# Altium PCB IMU_sensor_node_hardware.PcbDoc
Units mil, origin at the board's own origin, x right, y up, seen from the top; angles counter-clockwise.
Board outline 1815 x 2180 mil, 2 copper layers (Top Layer, Bottom Layer); 32 components, 22 nets, 193 pads, 12 vias.
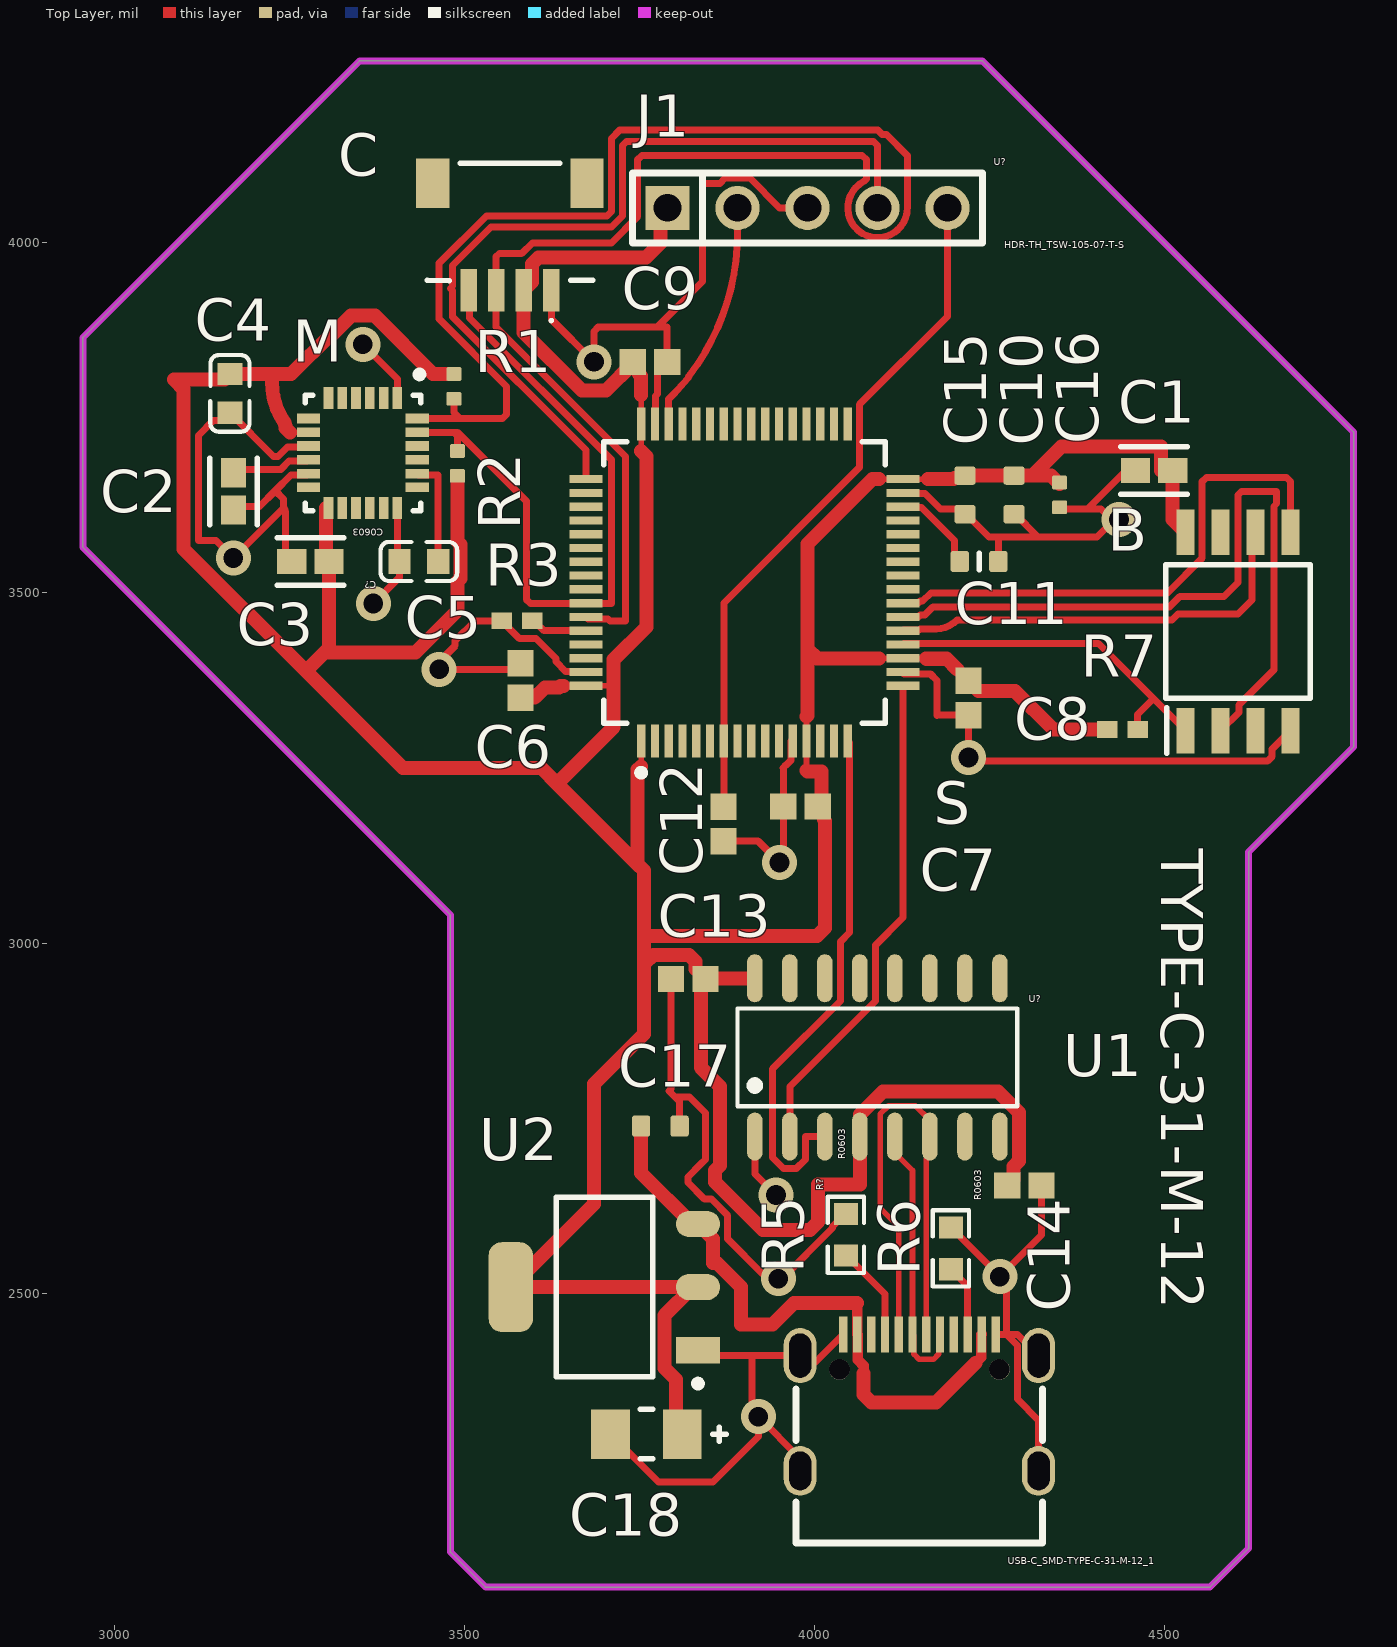
[diagram p0: Top Layer view]
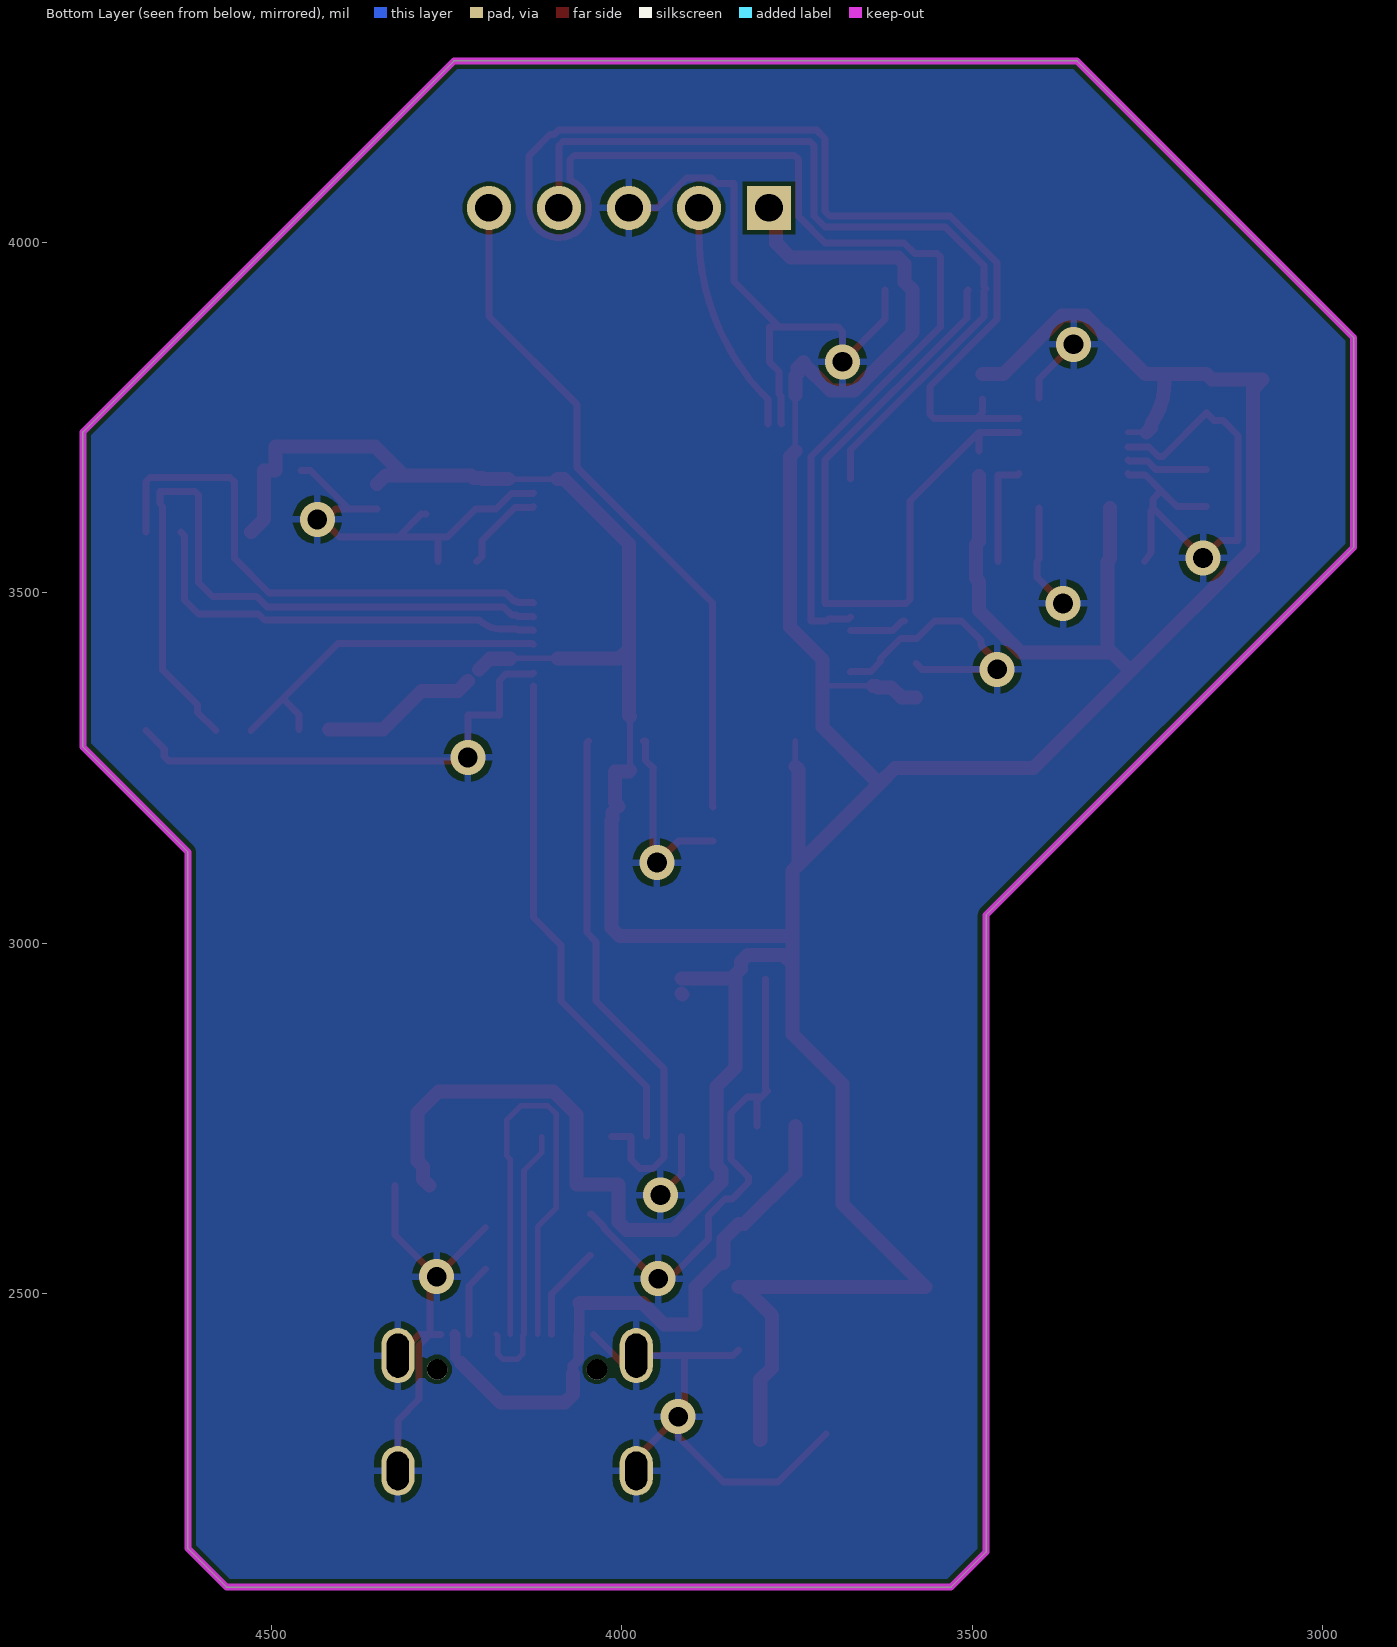
[diagram p1: Bottom Layer view, seen from below]
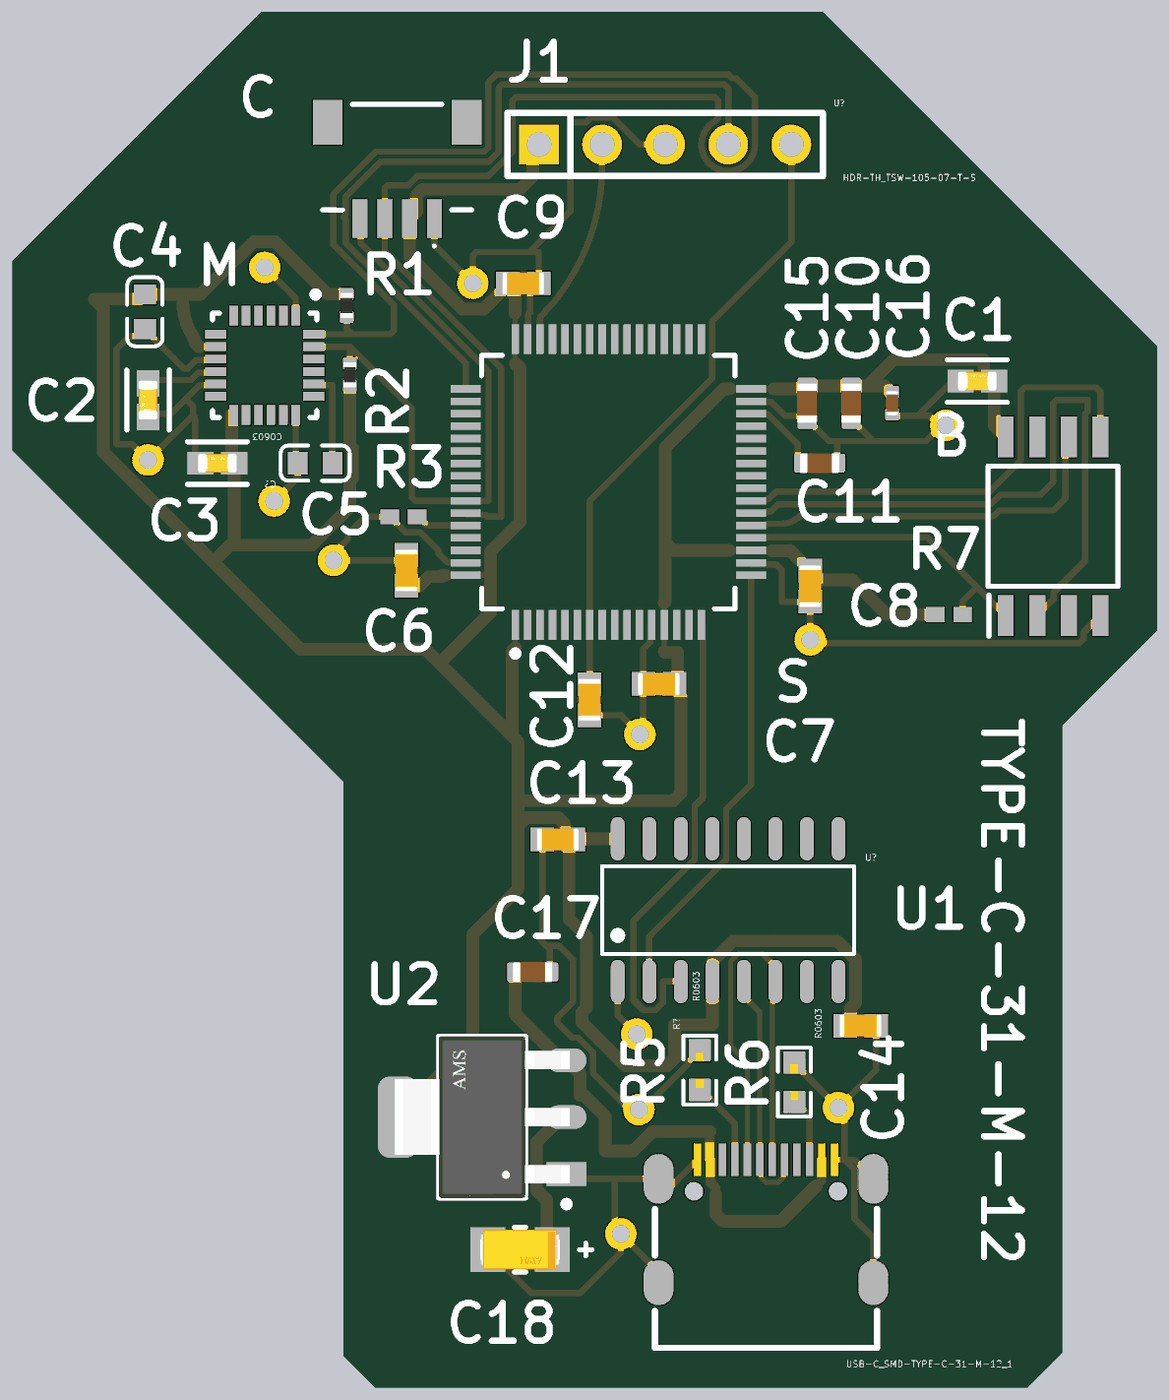
[diagram p2: 3D render of the assembled board from above, using the file's embedded part models]

## Layer stack, top to bottom
Top Solder: solder mask 0.4, Solder Resist, Dk 3.5
Top Layer: signal copper 1.4
Dielectric 1: dielectric 12.6, FR-4, Dk 4.8
Bottom Layer: signal copper 1.4
Bottom Solder: solder mask 0.4, Solder Resist, Dk 3.5

## Board outline
3480,3040 2955,3565 2955,3865 3350,4260 4240,4260 4305,4195 4770,3730 4770,3280 4620,3130 4620,2135 4565,2080 3530,2080 3480,2130

## Design rules (kind name [scope] priority, off if disabled: settings)
BoardOutlineClearance [All] p1: gap=12 ignorepadtopadclearanceinfootprint=FALSE
Clearance [All] p1: gap=5.91 ignorepadtopadclearanceinfootprint=FALSE
DiffPairsRouting [InDifferentialPairClass('USB')] p1: maxlimit=8 minlimit=8 mostfreqgap=8 toplayer_minwidth=8 toplayer_maxwidth=8 toplayer_prefwidth=8 bottomlayer_minwidth=8 bottomlayer_maxwidth=8 bottomlayer_prefwidth=8 maxuncoupledlength=500
HoleSize [All] p1: absolutevalues=TRUE maxlimit=100 minlimit=12 maxpercent=80.000 minpercent=20.000
MinimumAnnularRing [All] p1: minimumring=6
MinimumSolderMaskSliver MinimumSolderMaskSliver_1 [InComponent('M') OR InComponent('TYPE-C-31-M-12') vs InComponent('M') OR InComponent('TYPE-C-31-M-12')] p1: minsoldermaskwidth=0.1
MinimumSolderMaskSliver [All] p2: minsoldermaskwidth=4
PasteMaskExpansion [InComponent('M') And Name = '25'] p1: expansion=-99999 usepaste=FALSE
PasteMaskExpansion PasteMaskExpansion_1 [All] p2: expansion=0
PolygonConnect [All] p1: connectstyle=Relief reliefconductorwidth=10 reliefentries=4 polygonreliefangle="90 Angle" airgapwidth=10
RoutingVias [All] p1: holewidth=12 width=24 viastyle="Through Hole" minholewidth=12 minwidth=24 maxholewidth=12 maxwidth=24
SilkToSilkClearance [All] p1: silktosilkclearance=6
SilkToSolderMaskClearance [IsPad] p1: minsilkscreentomaskgap=6 clearancetoexposedcopper=TRUE
SolderMaskExpansion SolderMaskExpansion_1 [InComponent('M') OR InComponent('TYPE-C-31-M-12')] p1: expansion=0 istentingtop=FALSE
SolderMaskExpansion [All] p2: expansion=2 istentingtop=FALSE
Width Width_Power [InNet('3.3V')] p1: maxlimit=40 minlimit=8 preferedwidth=20
Width Width_Power_1 [InNet('VBUS')] p2: maxlimit=40 minlimit=15 preferedwidth=20
Width [All] p3: maxlimit=20 minlimit=8 preferedwidth=10
24 further rules are at their usual default settings.

## Classes and differential pairs
component class Support: C6 C7 C8 C9 C10 C11 C12 C13 C14 C15 C16 C17 C18 J1 R3 R5 R6 S TYPE-C-31-M-12 U1 U2
component class Periferals: B C C1 C2 C3 C4 C5 M R1 R2 R7

## Components (designator, comment, footprint, x,y, rotation, side; value= is the part's Value field where it differs from the comment)
B "W25Q128JVSIQ" SOIC127P790X216-8N 4605,3445 r90 top
C "SM04B-SRSS-TB(LF)(SN)" SM04BSRSSTBLFSN 3565,4030 r180 top
C1 "CC0603KRX7R9BB104" FP-CC0603-DA-IPC_B 4485,3675 r180 top value=100nF
C2 "CC0603KRX7R9BB104" FP-CC0603-DA-IPC_B 3170,3645 r270 top value=100nF
C3 "CC0603KRX7R9BB104" FP-CC0603-DA-IPC_B 3280,3545 r180 top value=100nF
C4 "10nF" PCBComponent_1#1 3165,3785 r270 top
C5 "0603B222K500NT" PCBComponent_1#1 3435,3545 r180 top value=2.2nF
C6 "Capacitor 100 nF +/-10% 50 V 0603" CAPC1608X90X40NL10T20 3580,3375 r90 top value=100nF
C7 "Capacitor 100 nF +/-10% 50 V 0603" CAPC1608X90X40NL10T20 3980,3195 r180 top value=100nF
C8 "Capacitor 100 nF +/-10% 50 V 0603" CAPC1608X90X40NL10T20 4220,3350 r270 top value=100nF
C9 "Capacitor 100 nF +/-10% 50 V 0603" CAPC1608X90X40NL10T20 3765,3830 r0 top value=100nF
C10 "Capacitor 1µF +/-40% 50V 0603" CAPC0603(1608)100_L 4285,3640 r270 top value=1µF
C11 "Capacitor 4.7µF +/-20% 10V 0603" CAPC0603(1608)100_L 4235,3545 r0 top value=4.7µF
C12 "Capacitor 100 nF +/-10% 50 V 0603" CAPC1608X90X40NL10T20 3870,3170 r270 top value=100nF
C13 "Capacitor 100 nF +/-10% 50 V 0603" CAPC1608X90X40NL10T20 3819.84,2948.49 r180 top value=100nF
C14 "Capacitor 100 nF +/-10% 50 V 0603" CAPC1608X90X40NL10T20 4299.84,2653.49 r0 top value=100nF
C15 "Capacitor 4.7µF +/-20% 10V 0603" CAPC0603(1608)100_L 4215,3640 r270 top value=4.7µF
C16 "Capacitor 10nF +/-20% 50V 0402" CAPC0402(1005)60_L 4350,3640 r270 top value=10nF
C17 "Capacitor 4.7µF +/-20% 10V 0603" CAPC0603(1608)100_L 3779.84,2738.49 r0 top value=4.7µF
C18 "TAJA226M010RNJ" FP-TAJA-MFG 3759.84,2298.49 r0 top value=22µF
J1 "TSW-105-07-T-S" PCBComponent_1#2 4030,4045 r0 top
M "MPU6050" INSE-QFN-24_V 3355,3700 r270 top
R1 "Resistor 2K2  +/-5 % 0402 63 mW" RESC0402(1005)_L 3485,3795 r270 top value=2.2k
R2 "Resistor 2K2  +/-5 % 0402 63 mW" RESC0402(1005)_L 3490,3685 r90 top value=2.2k
R3 "0402WGF1002TCE" RESC1005X40N 3575,3460 r180 top value=10k
R5 "0603WAF5101T5E" PCBComponent_1#3 4008.85,2580.61 r90 top value=5.1k
R6 "0603WAF5101T5E" PCBComponent_1#3 4158.85,2561.3 r90 top value=5.1k
R7 "0402WGF1002TCE" RESC1005X40N 4440,3305 r180 top value=10k
S "STM32F446RET6" FP-LQFP64-5W-MFG 3900,3515 r90 top
TYPE-C-31-M-12 "TYPE-C-31-M-12" PCBComponent_1#4 4149.84,2343.49 r0 top
U1 "CH340C" PCBComponent_1#5 4120.1,2969.14 r0 top
U2 "AMS1117-3.3" FP-AMS1117-IPC_A 3699.84,2508.49 r180 top

## Footprints (in the part's own frame and the unit in brackets; to place one, negate y for a bottom-side part, rotate by r counter-clockwise, add the part's x,y. Pads: shape width x height; smd on the part's side, far side on the other; paste and mask are expansions set on the pad)
CAPC0402(1005)60_L [mm] "Chip Capacitor, Body 1.0x0.5mm, Height 0.6mm, IPC High Density"
  rrect25% 0.5x0.55 smd: 1(-0.45,0) 2(0.45,0)
  body extent -0.5,-0.25 0.5,0.25, height 0.6
CAPC0603(1608)100_L [mm] "Chip Capacitor, Body 1.6x0.8mm, Height 1.0mm, IPC High Density"
  rrect25% 0.66x0.76 smd: 1(-0.7,0) 2(0.7,0)
  body extent -0.8,-0.4 0.8,0.4, height 0.95
CAPC1608X90X40NL10T20 [mm] "Chip Capacitor, 2-Leads, Body 1.70x0.90mm, IPC Medium Density"
  rect 0.95x0.95 smd: 1(-0.625,0) 2(0.625,0)
  body extent -0.85,-0.45 0.85,0.45, height 0.9
FP-AMS1117-IPC_A [mm]
  rect 1.604x0.952 smd paste+0 mask+0: 1(-3.395,2.29)
  rrect100% 1.604x0.952 smd paste+0 mask+0: 2(-3.395,0) 3(-3.395,-2.29)
  rrect59% 1.604x3.262 smd paste+0 mask+0: 4(3.395,0)
  silkscreen extent -3.52,-3.25 1.75,3.62, body extent -4.7,-3.75 4.7,3.75, height 0.25
FP-CC0603-DA-IPC_B [mil]
  rect 41.66x35.91 smd paste+0 mask+0: 1(-26.65,0) 2(26.65,0)
  silkscreen extent -47,-34 47,34, body extent -57,-28 57,28, height 10
FP-LQFP64-5W-MFG [mm]
  rect 1.2x0.3 smd paste+0 mask+0: 1(-5.75,3.75) 2(-5.75,3.25) 3(-5.75,2.75) 4(-5.75,2.25) 5(-5.75,1.75) 6(-5.75,1.25) 7(-5.75,0.75) 8(-5.75,0.25) 9(-5.75,-0.25) 10(-5.75,-0.75) 11(-5.75,-1.25) 12(-5.75,-1.75) 13(-5.75,-2.25) 14(-5.75,-2.75) 15(-5.75,-3.25) 16(-5.75,-3.75) 33(5.75,-3.75) 34(5.75,-3.25) 35(5.75,-2.75) 36(5.75,-2.25) 37(5.75,-1.75) 38(5.75,-1.25) 39(5.75,-0.75) 40(5.75,-0.25) 41(5.75,0.25) 42(5.75,0.75) 43(5.75,1.25) 44(5.75,1.75) 45(5.75,2.25) 46(5.75,2.75) 47(5.75,3.25) 48(5.75,3.75)
  rect 0.3x1.2 smd paste+0 mask+0: 17(-3.75,-5.75) 18(-3.25,-5.75) 19(-2.75,-5.75) 20(-2.25,-5.75) 21(-1.75,-5.75) 22(-1.25,-5.75) 23(-0.75,-5.75) 24(-0.25,-5.75) 25(0.25,-5.75) 26(0.75,-5.75) 27(1.25,-5.75) 28(1.75,-5.75) 29(2.25,-5.75) 30(2.75,-5.75) 31(3.25,-5.75) 32(3.75,-5.75) 49(3.75,5.75) 50(3.25,5.75) 51(2.75,5.75) 52(2.25,5.75) 53(1.75,5.75) 54(1.25,5.75) 55(0.75,5.75) 56(0.25,5.75) 57(-0.25,5.75) 58(-0.75,5.75) 59(-1.25,5.75) 60(-1.75,5.75) 61(-2.25,5.75) 62(-2.75,5.75) 63(-3.25,5.75) 64(-3.75,5.75)
  silkscreen extent -7.02,-5.1 5.1,5.1
FP-TAJA-MFG [mm]
  rect 1.4x1.8 smd paste+0 mask+0: 1(-1.3,0) 2(1.3,0)
  silkscreen extent -0.23,-0.9 2.9,0.9, body extent -2.1,-1 2.1,1, height 0.25
INSE-QFN-24_V [mm] "QFN, 24-Leads, Body 4.00x4.00mm, Pitch 0.50mm, Thermal Pad 2.7x2.6mm"
  rect 0.8x0.35 smd: 1(-2,1.25) 2(-2,0.75) 3(-2,0.25) 4(-2,-0.25) 5(-2,-0.75) 6(-2,-1.25) 13(2,-1.25) 14(2,-0.75) 15(2,-0.25) 16(2,0.25) 17(2,0.75) 18(2,1.25)
  rect 0.35x0.85 smd: 7(-1.25,-1.975) 8(-0.75,-1.975) 9(-0.25,-1.975) 10(0.25,-1.975) 11(0.75,-1.975) 12(1.25,-1.975) 19(1.25,1.975) 20(0.75,1.975) 21(0.25,1.975) 22(-0.25,1.975) 23(-0.75,1.975) 24(-1.25,1.975)
  silkscreen extent -2.97,-2.1 2.1,2.18, body extent -2,-2 2,2, height 0.95
PCBComponent_1#1 [mm]
  rect 0.8x0.9 smd paste+0 mask+0.051: 1(-0.7,0) 2(0.7,0)
  silkscreen extent -1.39,-0.71 1.39,0.71
PCBComponent_1#2 [mm]
  rect 1.6x1.6 hole 1 paste-2539.97 mask+0.05: 1(-6.096,0.127)
  round 1.6 hole 1 paste-2539.97 mask+0.05: 2(-3.556,0.127) 3(-1.016,0.127) 4(1.524,0.127) 5(4.064,0.127)
  silkscreen extent -7.37,-1.14 5.33,1.4
PCBComponent_1#3 [mm]
  rect 0.806x0.864 smd paste-100 mask+0.051: 1(-0.689,-0.914) 2(0.818,-0.914)
  silkscreen extent -1.32,-1.57 1.45,-0.25
PCBComponent_1#4 [mm]
  oval 1.2x2 hole 0.8 slot 1.6 at 90 deg paste-2539.97 mask+0.051: 1(4.325,1.706) 4(-4.325,1.706)
  oval 1.2x1.8 hole 0.8 slot 1.4 at 90 deg paste-2539.97 mask+0.051: 2(4.325,-2.474) 3(-4.325,-2.474)
  rect 0.3x1.3 smd paste-100 mask+0.051: A1B12(-2.766,2.474) A4B9(-2.258,2.474) A5(-1.25,2.474) A6(-0.25,2.474) A7(0.25,2.474) A8(1.25,2.474) B1A12(2.766,2.474) B4A9(2.258,2.474) B5(1.75,2.474) B6(0.75,2.474) B7(-0.75,2.474) B8(-1.75,2.474)
  round 0.75 hole 0.75 unplated paste-2539.97: MH1(-2.9,1.206) MH2(2.9,1.206)
  silkscreen extent -4.47,-5.09 4.47,0.49
PCBComponent_1#5 [mm]
  oval 0.56x1.745 smd paste+0 mask+0.051: 1(-5.214,-6.239) 2(-3.944,-6.239) 3(-2.674,-6.239) 4(-1.404,-6.239) 5(-0.134,-6.239) 6(1.136,-6.239) 7(2.406,-6.239) 8(3.676,-6.239) 9(3.676,-0.494) 10(2.406,-0.494) 11(1.136,-0.494) 12(-0.134,-0.494) 13(-1.404,-0.494) 14(-2.674,-0.494) 15(-3.944,-0.494) 16(-5.214,-0.494)
  silkscreen extent -5.84,-5.14 4.31,-1.6
RESC0402(1005)_L [mm] "Chip Resistor, Body 1.0x0.5mm, IPC High Density"
  rrect25% 0.5x0.55 smd: 1(-0.45,0) 2(0.45,0)
  body extent -0.5,-0.25 0.5,0.25, height 0.3
RESC1005X40N [mm]
  rect 0.75x0.6 smd: 1(-0.55,0) 2(0.55,0)
SM04BSRSSTBLFSN [mm]
  rect 0.6x1.55 smd: 1(-1.5,2.475) 2(-0.5,2.475) 3(0.5,2.475) 4(1.5,2.475)
  rect 1.2x1.8 smd: MP1(-2.8,-1.4) MP2(2.8,-1.4)
  silkscreen extent -3,-2.12 3,3.63
SOIC127P790X216-8N [mm]
  rect 1.65x0.65 smd: 1(-3.6,1.905) 2(-3.6,0.635) 3(-3.6,-0.635) 4(-3.6,-1.905) 5(3.6,-1.905) 6(3.6,-0.635) 7(3.6,0.635) 8(3.6,1.905)
  silkscreen extent -4.43,-2.62 2.42,2.62

## Part data
B: library part CMP-00007-1, "NOR Flash Serial (SPI, Dual SPI, Quad SPI) 3.3V 128M-bit 16M x 8 6ns 8-Pin SOIC Tube", Ambient Temperature Range High=85°C, Case/Package=SOP, Clock Frequency=133MHz, Frequency=104MHz, Max Supply Current=20mA, Max Supply Voltage=3.6V, Min Operating Temperature=-40°C, Min Supply Voltage=2.7V, Nominal Supply Voltage (DC)=3V, Temperature Grade=Industrial, China RoHS=Compliant, Export Control Classification Number (ECCN) Code=EAR99, Harmonized Tariff Schedule (HTS) Code=8542.32.00.51, Height=2.16mm, Height - Seated (Max)=2.16mm, Interface=Serial, Introduction Date=2016-11-14, Length=5.23mm, Lifecycle Status=Production, Max Operating Temperature=85°C, Memory Format=FLASH, Memory Size=16MB, Number of Circuits=1, Number of Terminals=8, REACH SVHC=Yes, RoHS=Compliant, Schedule B="8542320070, 8542320070", Terminal Pitch=1.27mm, Width=5.23mm
C: library part CMP-00010-1, "Connector Header, Side Entry, SR Series, 4 Position, 1.00mm, 50V, Surface Mount, Tin, Natural", Color=Natural, Contact Resistance=40mΩ, Current Rating=1A, Dielectric Material=Polyamide, Insulation Resistance=100MΩ, Max Operating Temperature=85°C, Max Voltage Rating (AC)=50V, Min Operating Temperature=-25°C, China RoHS=Compliant, Connector Type="Male Pin", Contact Material="Copper, Tin", Contact Plating=Tin, Depth=4.95mm, Gender=Male, Height=2.9mm, Housing Color=Natural, Housing Material=Nylon, Lead Free="Lead Free", Lead Pitch=1mm, Length=6mm, Lifecycle Status=Production, Max Current Rating=1A, Max Voltage Rating (DC)=50V, Mounting Technology="Surface Mount", Number of Contacts=4, Number of Positions=4, Number of Rows=1, Orientation="Right Angle", Packaging="Cut Tape", Pins=2, Pitch=990.6µm, REACH SVHC=Yes, RoHS=Compliant, Terminal Pitch=1mm, Termination=Solder, Voltage Rating=50V, Width=4.25mm
C1 C2 C3: library part CMP-00034-1, "Multilayer Ceramic Capacitor, CC Series, 0.1 - F, - 10%, X7R, 50 V, 0603 [1608 Metric]", Case Code (Imperial)=0603, Case Code (Metric)=1608, Dielectric=X7R, Dielectric Material=Ceramic, Max Operating Temperature=125°C, Min Operating Temperature=-55°C, Tolerance=10%, Voltage=50V, Case/Package=0603, China RoHS=Compliant, Country of Origin="Mainland China, Taiwan", Depth=800µm, Export Control Classification Number (ECCN) Code=EAR99, Halogen Free="Halogen Free", Harmonized Tariff Schedule (HTS) Code=8532.24.00.20, Height=800µm, Introduction Date=2005-08-18, Lead Free="Lead Free", Length=1.6mm, Lifecycle Status=Production, Material=Ceramic, Mounting Technology="Surface Mount", Number of Terminals=2, Pins=2, Radiation Hardening=No, REACH SVHC=Yes, RoHS=Compliant, Schedule B="8532240020, 8532240020", Termination=SMD/SMT, Thickness=889µm, Voltage Rating=50V, Voltage Rating (DC)=50V, Width=800µm
C4: library part CMP-00037-1, "50V 10nF X7R ±10% 0603 Multilayer Ceramic Capacitors MLCC - SMD/SMT ROHS", Case/Package=0603, Dielectric=X7R, Dielectric Material=Ceramic, Max Operating Temperature=125°C, Min Operating Temperature=-55°C, Tolerance=10%, Voltage Rating (DC)=50V, Country of Origin="Mainland China", Export Control Classification Number (ECCN) Code=EAR99, Harmonized Tariff Schedule (HTS) Code=8532.24.00.20, Height=800µm, Introduction Date=2005-06-22, Length=1.6mm, Lifecycle Status=Production, Mounting Technology="Surface Mount", Number of Terminals=2, REACH SVHC=Yes, RoHS=Compliant, Width=800µm
C5: library part CMP-00036-1, "Ceramic Capacitor, Multilayer, Ceramic, 50V, 10% +Tol, 10% -Tol, X7R, 15% TC, 0.0022uF, Surface Mount, 0603", Case/Package=0603, Dielectric Material=Ceramic, Max Operating Temperature=125°C, Min Operating Temperature=-55°C, Voltage Rating (DC)=50V, Country of Origin="Mainland China", Export Control Classification Number (ECCN) Code=EAR99, Harmonized Tariff Schedule (HTS) Code=8532.24.00.20, Height=800µm, Introduction Date=2005-06-22, Length=1.6mm, Lifecycle Status=Production, Mounting Technology="Surface Mount", Number of Terminals=2, REACH SVHC=Yes, RoHS=Compliant, Width=800µm
C6 C7 C8 C9 C12 C13 C14: library part CMP-001-00017-6, "Chip Capacitor, 100 nF, +/- 10%, 50 V, 0603 (1608 Metric)", Capacitor Type=Ceramic, Case/Package=0603, Max Operating Temperature=125°C, Min Operating Temperature=-55°C, Tolerance=10%, Voltage Rating=50V, Mounting Technology=SM, Pins=2, RoHS Compliant=True
C10: library part CMP-001-00078-4, "Chip Capacitor, 1µF +/-40%, 50V, 0603, Thickness 1 mm", Case/Package=0603, Max Operating Temperature=85°C, Min Operating Temperature=-55°C, Tolerance=10%, Voltage Rating=50V, Mounting Technology=SMT, Pins=2
C11 C15 C17: library part CMP-001-00076-4, "Chip Capacitor, 4.7µF +/-20%, 10V, 0603, Thickness 1 mm", Case/Package=0603, Max Operating Temperature=85°C, Min Operating Temperature=-55°C, Tolerance=10%, Voltage Rating=10V, Mounting Technology=SMT, Pins=2
C16: library part CMP-001-00069-3, "Chip Capacitor, 10nF +/-20%, 50V, 0402, Thickness 0.6 mm", Case/Package=0402, Max Operating Temperature=85°C, Min Operating Temperature=-55°C, Tolerance=5%, Voltage Rating=50V, Mounting Technology=SMT, Pins=2
C18: library part CMP-00000-1, "Cap Tant Solid 22uF 10V A CASE 20%( 3.2 X 1.6 X 1.6mm) Inward L SMD 3216-18 3 Ohm 125C T/R", Case Code (Imperial)=1206, Case Code (Metric)=3216, Dielectric Material=Tantalum, ESR (Equivalent Series Resistance)=3Ω, Leakage Current=2.2µA, Max Operating Temperature=125°C, Min Operating Temperature=-55°C, Ripple Current=63mA, Tolerance=20%, Voltage=10V, Case/Package=1206, China RoHS=Compliant, Country of Origin="Czechia, El Salvador", Depth=1.6mm, Dissipation Factor=8%, Export Control Classification Number (ECCN) Code=EAR99, Features="General Purpose", Harmonized Tariff Schedule (HTS) Code=8532.21.00.50, Height=1.6mm, Height - Seated (Max)=1.8034mm, Introduction Date=2005-08-24, Lead Free="Lead Free", Lead Pitch=1.1mm, Length=3.2mm, Life (Hours)=2000hours, Lifecycle Status=Production, Mounting Technology="Surface Mount", Number of Terminals=2, Pins=2, Polarity=Polar, Radiation Hardening=No, REACH SVHC=Yes, RoHS=Compliant, Schedule B=8532210050, Termination=SMD/SMT, Voltage Rating=10V, Voltage Rating (DC)=10V, Width=1.6mm
J1: library part CMP-00032-1, "CONN HEADER VERT 5POS 2.54MM / Connector Header Through Hole 5 position 0.100\" (2.54mm)", Color=Black, Manufacturer Lifecycle Status=PRODUCTION, Max Current Rating=7.6A, Max Operating Temperature=105°C, Max Voltage Rating (AC)=550V, Min Operating Temperature=-55°C, Connector Type="Male Pin", Contact Material=Bronze, Contact Mating Length=5.842mm, Contact Plating=Tin, Depth=2.54mm, Gender=Male, Housing Color=Black, Housing Material=Polyester, Lead Free="Lead Free", Lead Pitch=2.54mm, Length=12.7mm, Lifecycle Status=Production, Mounting Technology="Through Hole", Number of Contacts=5, Number of Positions=5, Number of Rows=1, Orientation=Straight, Packaging=Bulk, Pitch=2.54mm, Radiation Hardening=No, REACH SVHC=No, RoHS=Compliant, Termination=Solder, Width=2.54mm
M: library part CMP-010-00014-5, "3-Axis Gyroscope, 3-Axis Accelerometer, 2.375 to 3.46 V, -40 to 105 degC, 24-Pin QFN, RoHS, Tape and Reel", Case/Package=QFN, Manufacturer=InvenSense, Max Operating Temperature=85°C, Max Supply Voltage=3.6V, Min Operating Temperature=-40°C, Min Supply Voltage=2.5V, Package Description="24-Pin Quad Flat No-lead Package, Body 4 x 4 mm, Pitch 0.5 mm", Package Quantity=5000, Package Reference=QFN-24, Datasheet URL=https://datasheet.ciiva.com/1513/1788002-1513632.pdf, Datasheet Version="Rev. 3.4, 08/2013", Interface=I2C, Mounting Technology=SM, Packaging=CutTape, Pins=24, RoHS Compliant=True, Sensor Type=Motion
R1 R2: library part CMP-009-00166-3, "Chip Resistor, 2,2 kOhms, +/-5 %, 63 mW, -55 to 155 degC, 0402", Case/Package=0402, Max Operating Temperature=155°C, Min Operating Temperature=-55°C, Power=63mW, Tolerance=5%, Pins=2
R3 R7: library part CMP-00018-1, "Res Thick Film 0402 10K Ohm 1% 0.063W(1/16W) ±100ppm/C Pad SMD T/R", Case/Package=0402, Max Operating Temperature=155°C, Min Operating Temperature=-55°C, Power Rating=62.5mW, Temperature Coefficient=100ppm/°C, Tolerance=1%, Working Voltage=50V, China RoHS=Non-Compliant, Composition="Thick Film", Height=350µm, Length=1mm, Lifecycle Status=Production, Mounting Technology="Surface Mount", Number of Terminals=2, REACH SVHC=Yes, RoHS=Compliant, Width=500µm
R5 R6: library part CMP-00031-1, "Res Thick Film 0603 5.1K Ohm 1% 0.1W(1/10W) ±100ppm/C Pad SMD T/R"
S: library part CMP-00001-1, "MCU 32-bit ARM Cortex M4 RISC 512KB Flash 2.5V/3.3V Medical 64-Pin LQFP Frame", Ambient Temperature Range High=85°C, Case/Package=QFP, Clock Frequency=16MHz, Frequency=180MHz, Max Junction Temperature (Tj)=105°C, Max Power Dissipation=345mW, Max Supply Current=115mA, Max Supply Voltage=3.6V, Min Operating Temperature=-40°C, Min Supply Voltage=1.7V, Nominal Supply Current=1.12µA, Nominal Supply Voltage (DC)=3.3V, Temperature Grade=Industrial, ADC Channels (Resolution)="16-Ch 12-Bit", China RoHS=Compliant, Core Architecture="ARM Cortex-M4", Country of Origin="Mainland China, Philippines, Taiwan", DAC Channels (Resolution)="2-Ch 12-Bit", Data Bus Width=32b, EEPROM Memory Size=0B, Export Control Classification Number (ECCN) Code=3A991.A.2, Flash Memory Size=512kB, Harmonized Tariff Schedule (HTS) Code=8542.31.00.25, Height=1.6mm, Interface="IrDA, LIN, USB", Introduction Date=2015-03-16, Lead Free="Lead Free", Length=10mm, Lifecycle Status=Production, Max Operating Temperature=85°C, Memory Format=FLASH, Memory Size=512kB, Mounting Technology="Surface Mount", Number of A/D Converters=3, Number of ADC Channels=16, Number of Channels=16, Number of D/A Converters=2, Number of I2C Channels=4, Number of I/Os=50, Number of Programmable I/O=50, Number of PWM Channels=4, Number of SPI Channels=3, Number of Terminals=64, Number of Timers/Counters=2, Number of UART Channels=2, Number of USART Channels=4, Number of USB Channels=2, Oscillator Type=Internal, Peripherals="LCD, POR", Pins=64, RAM Size=128kB, REACH SVHC=Yes, RoHS=Compliant, Schedule B="8542310000, 8542310000", Terminal Pitch=500µm, Watchdog Timer=Yes, Width=10mm
TYPE-C-31-M-12: library part CMP-00023-1, "20V Type-C 1 16P Female head"
U1: library part CMP-00027-1, "uart to usb c"
U2: library part CMP-00028-1, "Gull Wing EAR99 Fixed Positive Single Output Ldo Regulator Dual Voltage Regulator Linear 125C 1.2W 1A 1.8MM", Case/Package=SOT-223, Dropout Voltage=1.1V, Max Junction Temperature (Tj)=125°C, Max Power Dissipation=1.2W, Max Supply Voltage=15V, Min Operating Temperature=-40°C, Nominal Supply Current=5mA, Output Current=1A, Output Voltage=3.3V, Height=1.8mm, Max Operating Temperature=125°C, Number of Outputs=1, Pins=2, RoHS=Compliant

## Via types
v1: diameter 50, hole 28, Top Layer to Bottom Layer, 12 vias

## Nets (pads, with @x,y where several pads share a name; then routed paths per layer and width w, separated by ;. In a path a pad name is that pad's centre, name@x,y a point inside that pad or via, vN(x,y) a via of type N, cw(c..) or ccw(c..) an arc to the next point about the centre after c; other vN are vias at no path point)
3.3V: B.8 C1.1 C3.1 C4.1 C6.1 C7.1 C8.1 C9.1 C10.1 C13.1 C14.1 C15.1 C16.1 C18.2 C.2 J1.1 M.8 M.13 R1.1 R2.1 R7.2 S.1 S.13 S.19 S.32 S.48 S.64 U1.4 U1.16 U2.2 U2.4 | length 8364
  Top Layer w8: 3250.81,3729.53 ccw(c3252.67,3737.31) 3254.53,3729.53 ; 3257.73,3729.53 M.8 ; 3637.64,3367.36 S.64 3713.24,3367.36 ; 3752.14,3782.86 3752.14,3779.61 3752.36,3779.39 S.48 3752.36,3702.92 ; 3752.36,3252.36 S.1 ; 3988.58,3246.42 S.13 3988.58,3323.58 ; 4092.25,3662.86 4092.47,3662.64 S.32 4162.36,3662.64 ; 4096.73,3406.73 S.19 4155,3406.73
  Top Layer w20: 3250.81,3729.53 3244.61,3735.73 ccw(c3224.63,3734.8) 3241.4,3745.7 cw(c3325.81,3800.81) 3225,3800.48 3225,3800.57 3225,3810 3222.45,3812.55 ; M.13@3302.58,3621.26 3302.58,3549.07 C3.1 3306.65,3421.65 3300,3415 ; R1.1 3455.27,3812.72 3371.98,3896 3338.02,3896 3312.02,3870 3310,3870 3252.55,3812.55 3222.45,3812.55 ; R2.1 3490,3573.51 3494.21,3569.3 3494.21,3520.7 3490,3516.49 3490,3475 3430,3415 3300,3415 ; C6.1 3600.39,3350.39 3615,3365 3635.28,3365 3637.32,3367.05 3641.6,3367.05 ; 3752.14,3782.86 3752.14,3809.58 3749.09,3812.63 3749.09,3821.3 C9.1 3740.39,3827.41 3701.98,3789 3668.02,3789 3584.68,3872.33 C.2 3596.24,3944.12 3596.24,3969.7 3605.62,3979.07 3759.07,3979.07 3780.22,4000.22 3780.22,4040.22 J1.1 ; 3752.36,3252.36 3747.5,3247.5 3747.5,3112.5 ; 3752.36,3702.92 3760.14,3695.14 3760.14,3451.66 3713.24,3404.76 3713.24,3367.36 3713.24,3308.24 3632.5,3227.5 ; C18.2@3802.48,2289.95 3802.48,2376.53 3786.02,2393 3786.02,2468.28 U2.2@3826.22,2508.49 ; U2.2 U2.2@3826.22,2508.49 ; C13.1@3837.56,2948.49 3837.56,2822.48 3865,2795.04 3865,2681.94 3858.19,2675.12 3858.19,2658.56 3926.74,2590 3993.28,2590 4005,2601.72 4005,2655 4065,2655 4064.84,2655.16 U1.4 4065.23,2723.88 4065.23,2755.22 4097.85,2787.84 4262.03,2787.84 4291.86,2758.01 4291.86,2688.97 4283.93,2681.04 4283.93,2662.19 C14.1 ; C13.1 3829.93,2963 3829.93,2973.82 3820.56,2983.19 3769.91,2983.19 3756.56,2969.84 ; C13.1@3845.63,2949.67 U1.16 ; U1.16@3913.89,2926.61 U1.16@3914.84,2927.56 ; 3988.58,3246.42 3990,3245 4010,3245 4010,3200.39 C7.1 ; 3988.58,3323.58 3990,3325 3990,3420 ; C7.1@4013.31,3186.3 4013.31,3176.28 4015,3174.58 4015,3021.72 4003.28,3010 3756.56,3010 ; 4091.84,3406.73 4003.27,3406.73 3990,3420 ; 4092.25,3662.86 4082.86,3662.86 3990,3570 3990,3420 ; 4162.36,3662.64 4198.32,3662.64 4200.24,3664.56 4212,3664.56 C15.1 C10.1 4311.44,3667.56 ; 4187.87,3406.73 4187.26,3406.12 ; C8.1@4203.94,3390.67 4188.48,3406.12 4187.26,3406.12 ; C8.1 4234.51,3360.09 4286.06,3360.09 4341.15,3305 R7.2 ; C16.1@4350,3655.43 4337.87,3667.56 4311.44,3667.56 ; 4489.13,3708.96 4352.83,3708.96 4311.44,3667.56 ; 4495.18,3708.96 4495.18,3675 C1.1 4511.65,3605.08 B.8 ; 3222.45,3812.55 C4.1 3157.45,3805 3085,3805 3099,3791 3099,3563.02 3273.51,3388.51 ; 3273.51,3388.51 3300,3415 ; 3273.51,3388.51 3412.02,3250 3610,3250 3632.5,3227.5 ; 3632.5,3227.5 3747.5,3112.5 ; 3747.5,3112.5 3756.56,3103.44 3756.56,3010 ; 3756.56,2969.84 3756.56,2870.2 3685,2798.65 3685,2627.31 U2.4 U2.2@3826.22,2508.49 ; 3756.56,2969.84 3756.56,3010 ; 4187.26,3406.12 4186.65,3405.51 4159.93,3405.51 4159.32,3406.12 4187.26,3406.12
D+: TYPE-C-31-M-12.A6 TYPE-C-31-M-12.B6 U1.5 | length 392.3
  Top Layer w8: U1.5 4114.84,2700.16 4140,2675 TYPE-C-31-M-12.A6 4141.91,2438.99 4141.91,2413.03 4149.63,2405.31 4169.73,2405.31 4177.46,2413.04 4177.46,2438.99 TYPE-C-31-M-12.B6
D-: TYPE-C-31-M-12.A7 TYPE-C-31-M-12.B7 U1.6 | length 718.5
  Top Layer w8: TYPE-C-31-M-12.B7 4120.31,2594.81 4093.82,2621.3 4093.82,2724.18 4093.82,2755.52 4106.13,2767.84 4114.17,2767.84 4143.82,2767.84 4164.84,2746.81 U1.6 4164.84,2696.36 4159.68,2691.2 TYPE-C-31-M-12.A7
GND: B.4 C1.2 C2.2 C3.2 C4.2 C5.2 C6.2 C7.2 C8.2 C9.2 C10.2 C11.2 C12.2 C13.2 C14.2 C15.2 C16.2 C17.2 C18.1 C.1 J1.3 M.1 M.9 M.11 M.18 R3.2 R5.2 R6.2 S.12 S.18 S.31 S.47 S.63 TYPE-C-31-M-12.1 TYPE-C-31-M-12.2 TYPE-C-31-M-12.3 TYPE-C-31-M-12.4 TYPE-C-31-M-12.A1B12 TYPE-C-31-M-12.B1A12 U1.1 U2.1 | length 5971.9
  Top Layer w10: C2.2@3165,3623.35 3207.12,3623.35 3229.79,3646.01 ; C3.2 3244.5,3557.96 3244.5,3614.5 ccw(c3234.5,3614.5) 3241.57,3621.57 ; M.11 3275.45,3668.68 3252.45,3668.68 3229.79,3646.01 ; M.9@3277.24,3708.53 3247.05,3708.53 3233.52,3695 3227.45,3695 C4.2 3154.25,3746.7 3141.7,3746.7 3120,3725 3120,3575 3145,3575 v1(3170,3550) 3241.57,3621.57 ; v1(3355,3855) 3404.21,3805.79 M.1 ; v1(3370,3485) 3407.45,3522.45 C5.2 3404.21,3548.23 M.18 ; v1(3463.99,3391.01) v1@3463.99,3399.61 ; C6.2 3571.4,3391.01 3472.59,3391.01 v1@3463.99,3399.61 ; C.1 3624.06,3890.94 v1(3685,3830) 3685,3873.75 3690.86,3879.61 3775,3879.61 ; S.63 3672.72,3387.95 3644.47,3387.95 3630.59,3401.83 3630.59,3406.39 3601.98,3435 3578.35,3435 R3.2 3515,3460 3486.82,3431.82 3486.82,3424.66 3463.99,3401.83 v1@3463.99,3399.61 ; C18.1 3777.15,2230 3855,2230 3919.84,2294.84 v1(3919.84,2323.49) ; S.47 3772.95,3742.28 3772.95,3774.1 3773.05,3774.2 3773.05,3781.25 3775.91,3784.11 3775.91,3816.3 C9.2 3789.61,3879.61 3775,3879.61 ; C13.2 3795.23,2791.28 3792.44,2788.49 3800.93,2780 ; C17.2 3807.4,2773.53 3800.93,2780 ; U2.1 3841.19,2410.64 3910.38,2410.64 ; C12.2 3919.61,3145.39 v1(3950,3115) 3955.39,3120.39 C7.2 3955.39,3249.61 3955,3250 3959,3254 3959.67,3254 3966.12,3260.44 3966.12,3288.62 S.12 ; U1.1 3914.84,2670.16 v1(3945,2640) ; TYPE-C-31-M-12.3 3979.57,2263.76 v1(3919.84,2323.49) ; TYPE-C-31-M-12.4 3910.38,2410.64 ; TYPE-C-31-M-12.4@3987.25,2387.21 TYPE-C-31-M-12.A1B12 ; J1.3 3950.1,4050 3907.6,4092.5 3872.4,4092.5 3864.9,4085 3840,4085 3840,3944.61 3775,3879.61 ; R5.2 4043.71,2612.8 4026,2595.09 4026,2593.02 3953.46,2520.48 v1(3948.35,2520.48) 3940.7,2528.13 3925.24,2528.13 3876.08,2577.29 3876.08,2610.96 3852.68,2634.37 3842.53,2634.37 3819.13,2657.78 3819.13,2666.06 3837.81,2684.74 3838.11,2684.74 3844.09,2690.73 3844.09,2757.45 3821.54,2780 3800.93,2780 ; S.18@4126.38,3385.73 4127.5,3384.61 4165.39,3384.61 4175,3375 4175,3325 4175.39,3325.39 C8.2 v1(4220,3265) 4225.21,3259.79 4647.35,3259.79 4653.8,3266.23 4653.8,3277.06 B.4 ; S.31 4127.28,3642.05 4157.95,3642.05 4180,3620 4209.4,3620 4249.4,3580 4265,3580 ; R6.2 v1(4264.84,2523.49) ; TYPE-C-31-M-12.B1A12 4274.3,2440.9 ; C11.2 4262.56,3577.56 4265,3580 ; C10.2@4280,3612.44 C10.2@4281.96,3612.44 ; C10.2@4286.96,3612.44 4319.4,3580 ; TYPE-C-31-M-12.2 4320.11,2318.21 4289.84,2348.49 4289.84,2425.36 4274.3,2440.9 ; TYPE-C-31-M-12.1 4289.86,2440.9 4274.3,2440.9 ; C14.2 4324.45,2583.09 v1(4264.84,2523.49) ; C16.2@4350,3620 4390,3620 ; v1(4435,3605) v1@4428.43,3605 ; C1.2 4445,3675 4390,3620 ; 3229.79,3646.01 3241.57,3634.23 3241.57,3621.57 ; 3910.38,2410.64 3910.38,2332.95 v1(3919.84,2323.49) ; v1(4264.84,2523.49) 4274.3,2514.03 4274.3,2440.9 ; 4265,3580 4319.4,3580 ; 4319.4,3580 4403.43,3580 v1@4428.43,3605 ; 4390,3620 4409.18,3620 4424.18,3605 v1@4428.43,3605
NetC2_1: C2.1 M.10 | length 117.8
  Top Layer w10: C2.1@3165,3676.65 3237.8,3676.65 3249.51,3688.36 3275.45,3688.36 M.10
NetC5_1: C5.1 M.20 | length 154.2
  Top Layer w10: M.20 3434.55,3668.68 3462.55,3668.68 C5.1
NetC11_1: C11.1 S.30 | length 126.7
  Top Layer w10: S.30 4127.28,3622.36 4152.68,3622.36 4200.08,3574.96 4200.08,3552.36 C11.1
NetR3_1: R3.1 S.60 | length 82.7
  Top Layer w10: R3.1 3599.61,3460 3613.5,3446.1 S.60
NetR5_1: R5.1 TYPE-C-31-M-12.A5 | length 136.4
  Top Layer w10: R5.1 4045.97,2553.49 4100.63,2498.83 TYPE-C-31-M-12.A5
NetR6_1: R6.1 TYPE-C-31-M-12.B5 | length 103.2
  Top Layer w10: R6.1 4218.74,2510.28 TYPE-C-31-M-12.B5
NRST: C12.1 J1.5 S.7 | length 987.9
  Top Layer w10: C12.1 3870.47,3195.08 S.7 3870.47,3485.47 4064.54,3679.54 4064.54,3769.54 4190,3895 J1.5
PA2: S.16 U1.3 | length 760.5
  Top Layer w10: U1.3 3986.86,2723.49 3986.86,2691.04 3973.96,2678.14 3955.72,2678.14 3940,2693.85 3940,2820.36 4036.86,2917.22 4036.86,3001.86 4050,3015 4050,3286.26 S.16
PA3: S.17 U1.2 | length 710.8
  Top Layer w10: U1.2 3964.84,2795.2 4086.86,2917.22 4086.86,2996.86 4126.38,3036.38 S.17
PA4: B.1 R7.1 S.20 | length 509.1
  Top Layer w10: S.20 4127.6,3427.64 4405.63,3427.64 4484.13,3349.13 ; R7.1 4461.65,3326.65 4484.13,3349.13 ; B.1 4484.13,3349.13
PA5: B.6 S.21 | length 613.8
  Top Layer w10: S.21 4127.28,3447.01 4148.98,3447.01 4150.86,3448.88 4173.92,3448.88 ; 4173.97,3448.88 ccw(c4173.97,3490.77) 4203.59,3461.15 4510.5,3461.15 4519.35,3470 4605,3470 4625,3490 4625,3581.73 B.6
PA6: B.2 S.22 | length 1055.9
  Top Layer w10: S.22 4127.28,3466.69 4148.98,3466.69 4150.86,3468.57 4157.5,3468.57 4168.93,3480 4506.73,3480 4521.73,3495 4585,3495 4605,3515 4605,3640 4610,3645 4660,3645 4660,3627.56 4656.2,3623.77 4656.2,3390.3 4606.2,3340.3 4606.2,3329.47 B.2
PA7: B.5 S.23 | length 766.9
  Top Layer w10: S.23 4127.28,3486.38 4148.98,3486.38 4150.86,3488.25 4154.56,3488.25 4166.3,3500 4504.1,3500 4553.8,3549.7 4553.8,3659.14 4559.65,3665 4674.14,3665 4680,3659.14 B.5
PA13: J1.2 S.46 | length 335
  Top Layer w10: S.46 3791.73,3776.73 ccw(c3554.49,4013.97) 3804.37,3790.08 3819.31,3806.74 cw(c3828.95,3804.09) 3820.98,3810.14 ccw(c3554.49,4013.97) 3890,4013.97 J1.2
PA14: J1.4 S.49 | length 1217.3
  Top Layer w10: S.49 3673.62,3704.05 3483.13,3894.54 3483.13,3931.87 3480,3935 3483.13,3938.13 3483.13,3967.63 3538.19,4022.68 3710.04,4022.68 3725.86,4038.5 3725.86,4139.14 3731.72,4145 4084.14,4145 4090,4139.14 J1.4
PB6: C.4 M.23 R2.2 S.58 | length 1022.1
  Top Layer w10: M.23 3485,3729.53 ; R2.2 3490,3724.53 3485,3729.53 ; C.4 3507.4,3931.11 3507.4,3892.91 3710,3690.3 3710,3485 3674.09,3485 S.58 3673.15,3485 3594.16,3485 3588.3,3490.86 3588.3,3631.23 3490,3729.53 3485,3729.53
PB7: C.3 M.24 R1.2 S.59 | length 2822.3
  Top Layer w10: M.24 3493.45,3749.21 ; R1.2 3485,3757.66 3493.45,3749.21 ; S.59 3676.4,3463.01 3704.81,3463.01 3707.82,3460 3730,3460 3730,3695 3545.32,3879.68 3545.32,3980.32 3550,3985 3581.85,3985 3596.92,4000.07 3710.07,4000.07 3747.5,4037.5 3747.5,4119.14 3753.36,4125 4068.14,4125 4074,4119.14 4074,4091.46 4071.07,4088.53 4070.07,4087.53 ccw(c4090,4050) 4132.49,4050 4132.49,4125.13 4102.63,4155 4096.77,4155 4090.77,4161 3721.72,4161 3709.86,4149.14 3709.86,4045.13 3703.41,4038.68 3531.56,4038.68 3464,3971.12 3464,3891.05 3560,3795.05 3560,3755.07 3554.14,3749.21 3493.45,3749.21
VBUS: C17.1 TYPE-C-31-M-12.A4B9 TYPE-C-31-M-12.B4A9 U2.3 | length 896.1
  Top Layer w15: 4060.94,2485.67 TYPE-C-31-M-12.A4B9 4061.63,2440.21 4061.63,2404.83 4070,2396.46 4070,2385 ; 4230,2400 4238.05,2408.05 4238.05,2440.21 TYPE-C-31-M-12.B4A9
  Top Layer w20: C17.1 3752.28,2671.76 3825.4,2598.64 U2.3 3855,2577.15 3855,2543.23 3860.73,2543.23 3895,2508.96 3895,2455 3940,2455 3970.67,2485.67 4060.94,2485.67 ; 4070,2385 4070,2355.36 4081.72,2343.65 4173.65,2343.65 4230,2400
pads on no net: B.3 B.7 C.MP1 C.MP2 M.2 M.3 M.4 M.5 M.6 M.7 M.12 M.14 M.15 M.16 M.17 M.19 M.21 M.22 S.2 S.3 S.4 S.5 S.6 S.8 S.9 S.10 S.11 S.14 S.15 S.24 S.25 S.26 S.27 S.28 S.29 S.33 S.34 S.35 S.36 S.37 S.38 S.39 S.40 S.41 S.42 S.43 S.44 S.45 S.50 S.51 S.52 S.53 S.54 S.55 S.56 S.57 S.61 S.62 TYPE-C-31-M-12.A8 TYPE-C-31-M-12.B8 TYPE-C-31-M-12.MH1 TYPE-C-31-M-12.MH2 U1.7 U1.8 U1.9 U1.10 U1.11 U1.12 U1.13 U1.14 U1.15

## Polygon pours and split planes (outlines as drawn)
GND on Bottom Layer "GND_BOTTOM " (solid, remove dead copper, pour order 2): 3350,4260 2955,3865 2955,3565 3480,3040 3480,2130 3530,2080 4565,2080 4620,2135 4620,3130 4770,3280 4770,3730 4240,4260

## Keep-outs
Keep-Out Layer:
  lines w10: 2955,3565 3480,3040 3480,2130 3530,2080 4565,2080 4620,2135 4620,3130 4770,3280 4770,3665 4770,3730 4305,4195 4240,4260 3350,4260 2955,3865 2955,3630 2955,3565

## Text inside footprints (layer, text, board x,y; h text height)
C5: Top Overlay "C0603" at 3383.72,3591.95 h10 r180; Top Overlay "C?" at 3373.72,3516.95 h10 r180
J1: Top Overlay "HDR-TH_TSW-105-07-T-S" at 4271,3992.67 h10; Top Overlay "U?" at 4256,4111 h10
R5: Top Overlay "R0603" at 4044,2691 h10 r90; Top Overlay "R?" at 4012.85,2646.61 h10 r90
R6: Top Overlay "R0603" at 4237.85,2632.3 h10 r90
TYPE-C-31-M-12: Top Overlay "USB-C_SMD-TYPE-C-31-M-12_1" at 4276,2112.67 h10
U1: Top Overlay "U?" at 4306.1,2915.14 h10